# Altium PCB Copy of PCB2.PcbDoc
Units mil, origin at the board's own origin, x right, y up, seen from the top; angles counter-clockwise.
Board outline 2785 x 2500 mil, 2 copper layers (Top Layer, Bottom Layer); 53 components, 60 nets, 237 pads, 31 vias.
Unrouted connection lines stored in the file: 41.
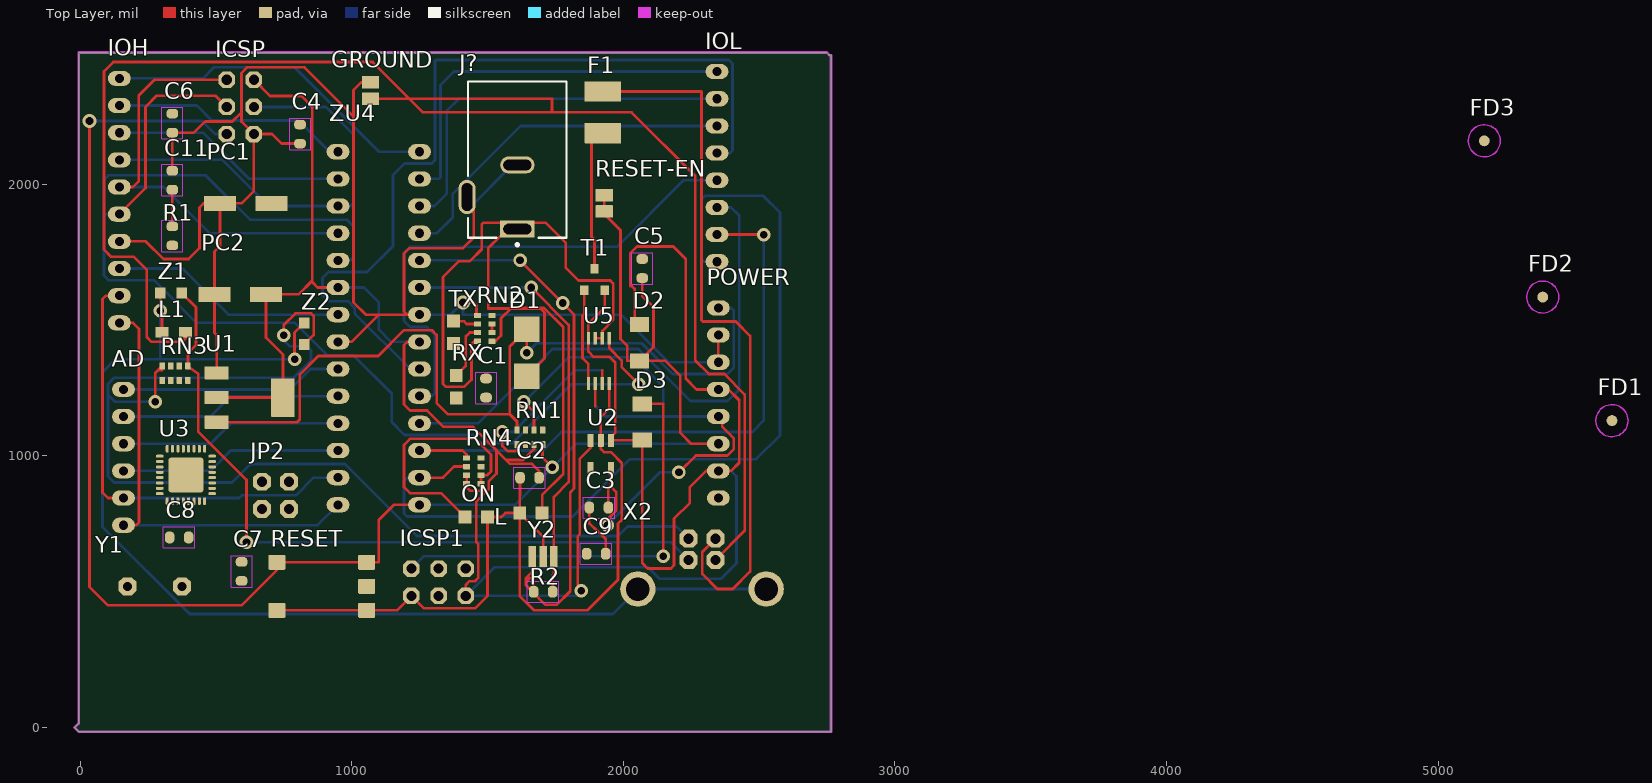
[diagram p0: Top Layer view]
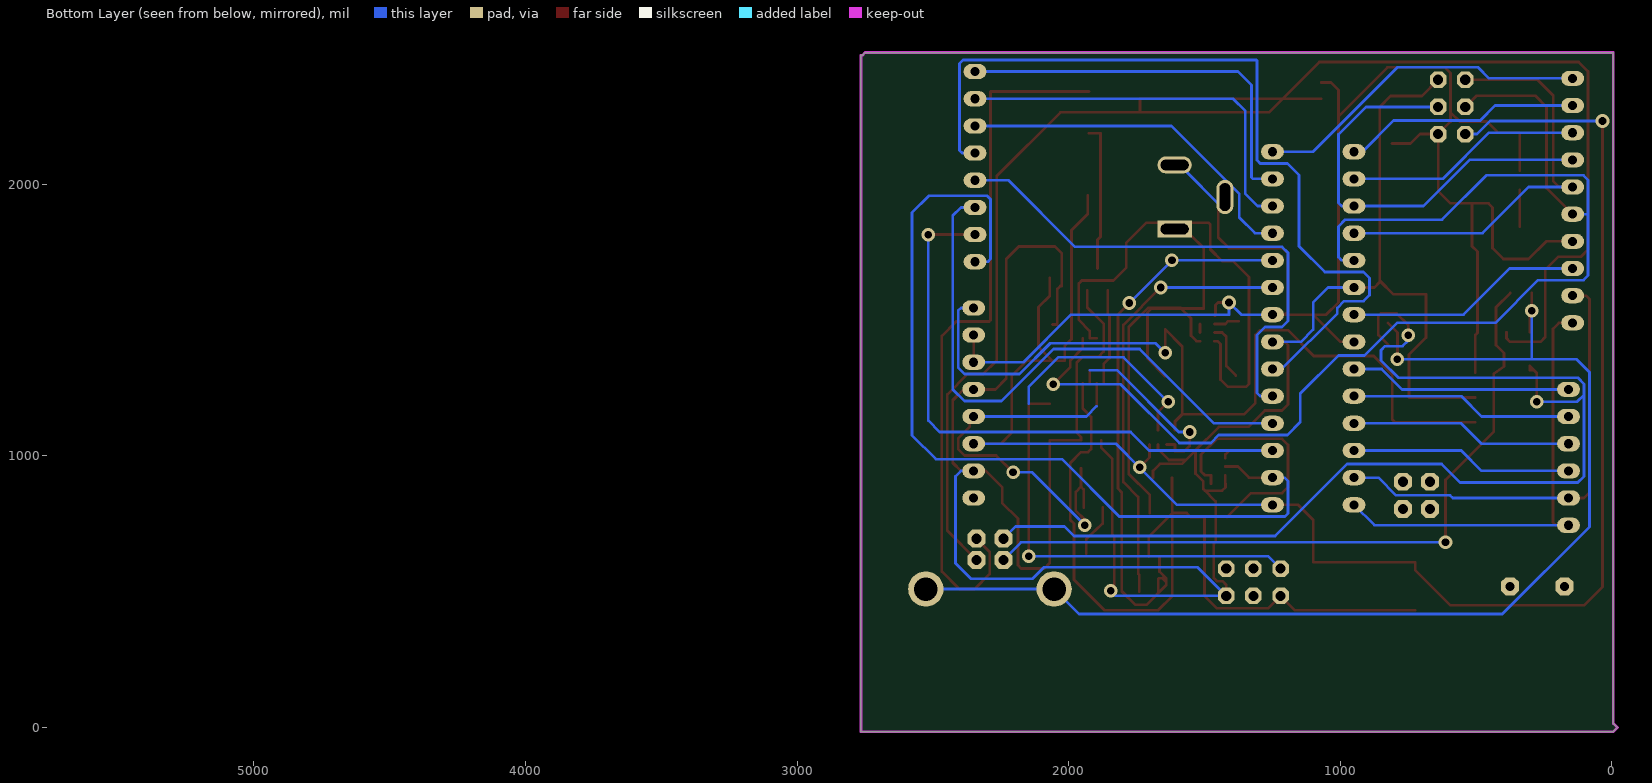
[diagram p1: Bottom Layer view, seen from below]

## Layer stack, top to bottom
Top Solder: solder mask 0.4, Solder Resist, Dk 3.5
Top Layer: signal copper 1.4
Dielectric 1: dielectric 12.6, FR-4, Dk 4.8
Bottom Layer: signal copper 1.4
Bottom Solder: solder mask 0.4, Solder Resist, Dk 3.5

## Board outline
2765,2475 2765,-15 -5,-15 -20,0 -5,15 -5,2485 2750,2485 2760,2475

## Design rules (kind name [scope] priority, off if disabled: settings)
Clearance [All] p1: gap=10 ignorepadtopadclearanceinfootprint=FALSE
PolygonConnect [All] p1: connectstyle=Relief reliefconductorwidth=10 reliefentries=4 polygonreliefangle="90 Angle" airgapwidth=10
RoutingVias [All] p1: holewidth=28 width=50 viastyle="Through Hole" minholewidth=28 minwidth=50 maxholewidth=28 maxwidth=50
SolderMaskExpansion [All] p1: expansion=0 istentingtop=FALSE
SupplyNets "Schematic Supply Nets_1" [InNet('+5V')] p1: voltage=0.000
SupplyNets "Schematic Supply Nets" [InNet('GND')] p2: voltage=0.000
Width [All] p1: maxlimit=10 minlimit=10 preferedwidth=10
30 further rules are at their usual default settings.

## Components (designator, comment, footprint, x,y, rotation, side; value= is the part's Value field where it differs from the comment)
AD "6x1F-H8.5" 1X06 160,995 r270 top
C1 "100n" C0603-ROUND 1495,1250 r90 top
C2 "100n" C0603-ROUND 1655,920 r0 top
C3 "1u" C0603-ROUND 1910,810 r0 top
C4 "100n" C0603-ROUND 810,2185 r90 top
C5 "100n" C0603-ROUND 2070,1690 r270 top
C6 "100n" C0603-ROUND 340,2225 r90 top
C7 "100n" C0603-ROUND 595,575 r270 top
C8 "1u" C0603-ROUND 365,700 r0 top
C9 "22p" C0603-ROUND 1900,640 r0 top
C11 "22p" C0603-ROUND 340,2015 r90 top
D1 "M7" SMB 1645,1380 r270 top
D2 "CD1206-S01575" MINIMELF 2060,1416.93 r270 top
D3 "CD1206-S01575" MINIMELF 2070,1125 r90 top
F1 "MF-MSMF050-2 500mA" L1812 1925,2265 r90 top
FD1 "FIDUCIALMOUNT" FIDUCIA-MOUNT 5640,1130 r0 top
FD2 "FIDUCIALMOUNT" FIDUCIA-MOUNT 5385,1585 r0 top
FD3 "FIDUCIALMOUNT" FIDUCIA-MOUNT 5170,2160 r0 top
GROUND "SJ" SJ 1070,2345 r270 top
ICSP "3x2 M" 2X03 590,2285 r270 top
ICSP1 "3x2 M" 2X03 1320,535 r180 top
IOH "10x1F-H8.5" 1X10 145,1940 r270 top
IOL "8x1F-H8.5" 1X08 2345,2065 r90 top
J? "PJ-102A" FP-PJ-102A-MFG 1610,2090.91 r0 top
JP2 "2x2 M - NM" 2X02 720,855 r270 top
L "YELLOW" CHIP-LED0805 1660,790 r90 top
L1 "BLM21" 0805 345,1455 r180 top
ON "GREEN" CHIP-LED0805 1458.66,775 r270 top
PC1 "47u" PANASONIC_D 610,1930 r0 top
PC2 "47u" PANASONIC_D 590,1595 r0 top
POWER "8x1F-H8.5" 1X08 2350,1195 r90 top
R1 "1M" R0603-ROUND 340,1810 r90 top
R2 "1M" R0603-ROUND 1705,500 r180 top
RESET "TS42031-160R-TR-7260" TS42 890,520 r180 top
RESET-EN "SJ" SJ 1930,1930 r90 top
RN1 "10K" CAY16 1655.75,1068.43 r0 top
RN2 "1K" CAY16 1490,1470 r90 top
RN3 "22R" CAY16 350,1305 r0 top
RN4 "1K" CAY16 1450,945 r270 top
RX "YELLOW" CHIP-LED0805 1385,1255 r180 top
T1 "FDN340P" SOT-23 1895,1650 r180 top
TX "YELLOW" CHIP-LED0805 1375,1455 r180 top
U1 "NCP1117ST50T3G" SOT223 625,1215 r270 top
U2 "LP2985-33DBVR" SOT23-DBV 1917.4,1006.18 r180 top
U3 "ATMEGA16U2-MU(R)" MLF32 390,930 r180 top
U5 "LMV358IDGKR" MSOP08 1910,1350 r0 top
U$1 "DISCLAIMER" DISCLAIMER 6815,-1510 r90 top
X2 "USB-B_TH" PN61729 2290,510 r0 top
Y1 "16MHz" QS 275,520 r180 top
Y2 "CSTCE16M0V53-R0 16MHZ" RESONATOR 1705,630 r0 top
Z1 "CG0603MLC-05E" CT/CN0603 335,1600 r180 top
Z2 "CG0603MLC-05E" CT/CN0603 825,1450 r90 top
ZU4 "ATMEGA328P-PU" DIL28-3 1100,1470 r90 top

## Footprints (in the part's own frame and the unit in brackets; to place one, negate y for a bottom-side part, rotate by r counter-clockwise, add the part's x,y. Pads: shape width x height; smd on the part's side, far side on the other; paste and mask are expansions set on the pad)
1X06 [mil] "1X06"
  oval 56x84 / inner round 0 / far side oval 56x84 hole 33.46: 1(-250,0) 2(-150,0) 3(-50,0) 4(50,0) 5(150,0) 6(250,0)
1X08 [mil] "1X08"
  oval 56x84 / inner round 0 / far side oval 56x84 hole 33.46: 1(-350,0) 2(-250,0) 3(-150,0) 4(-50,0) 5(50,0) 6(150,0) 7(250,0) 8(350,0)
1X10 [mil] "1X10"
  oval 56x84 / inner round 0 / far side oval 56x84 hole 33.46: 1(-450,0) 2(-350,0) 3(-250,0) 4(-150,0) 5(-50,0) 6(50,0) 7(150,0) 8(250,0) 9(350,0) 10(450,0)
2X02 [mil] "2X02"
  oct 66x66 / inner round 0 / far side oct 66x66 hole 37.4: 1(-50,-50) 2(-50,50) 3(50,-50) 4(50,50)
2X03 [mil] "2X03"
  oct 61.02x61.02 / inner round 0 / far side oct 61.02x61.02 hole 37.4: 1(-100,-50) 2(-100,50) 3(0,-50) 4(0,50) 5(100,-50) 6(100,50)
0805 [mm] "0805"
  rrect5% 1.2x1 smd: 1(-1.1,0) 2(1.1,0)
C0603-ROUND [mil] "C0603-ROUND"
  rrect80% 35.37x43.31 smd: 1(-35,0) 2(35,0)
  Top Layer keep-out lines w2: -57.99,38.7 -57.99,-38.7 57.99,-38.7 57.99,38.7 -57.99,38.7
CAY16 [mm] "CAY16"
  rrect10% 0.5x0.65 smd: 1(-1.2,-0.675) 2(-0.4,-0.675) 3(0.4,-0.675) 4(1.2,-0.675) 5(1.2,0.675) 6(0.4,0.675) 7(-0.4,0.675) 8(-1.2,0.675)
CHIP-LED0805 [mil] "CHIP-LED0805"
  rrect4% 47.24x47.24 smd: A(0,-41.34) C(0,41.34)
CT/CN0603 [mm] "CT/CN0603"
  rrect5% 1x1 smd: 1(-1,0) 2(1,0)
DIL28-3 [mil] "DIL28-3"
  oval 56x84 / inner round 0 / far side oval 56x84 hole 33.46: 1(-650,-150) 2(-550,-150) 3(-450,-150) 4(-350,-150) 5(-250,-150) 6(-150,-150) 7(-50,-150) 8(50,-150) 9(150,-150) 10(250,-150) 11(350,-150) 12(450,-150) 13(550,-150) 14(650,-150) 15(650,150) 16(550,150) 17(450,150) 18(350,150) 19(250,150) 20(150,150) 21(50,150) 22(-50,150) 23(-150,150) 24(-250,150) 25(-350,150) 26(-450,150) 27(-550,150) 28(-650,150)
DISCLAIMER [mil] "DISCLAIMER"
FIDUCIA-MOUNT [mil] "FIDUCIA-MOUNT"
  rrect100% 40x40 smd: P$1(0,0)
  Top Layer keep-out circle w5: c0,0 r59.06
FP-PJ-102A-MFG [mm]
  rect 3.2x1.6 hole 1 slot 2.6 at 0 deg paste-2539.97 mask+0: 1(0,-6.5)
  rrect100% 3.2x1.6 hole 1 slot 2.6 at 0 deg paste-2539.97 mask+0: 2(0,-0.5)
  rrect100% 1.6x3.2 hole 2.6 slot 1 at 0 deg paste-2539.97 mask+0: 3(-4.7,-3.5)
  silkscreen extent -4.6,-8.07 4.6,7.3, body extent -5.6,-7.4 4.7,7.4, height 0.25
L1812 [mil] "L1812"
  rrect2% 74.8x133.86 smd: 1(-76.77,0) 2(76.77,0)
MINIMELF [mil] "MINIMELF"
  rrect3% 55.12x70.87 smd: A(66.93,0) C(-66.93,0)
MLF32 [mil] "MLF32"
  rrect80% 27.56x11.02 smd: 1(-96.46,68.9) 2(-96.46,49.21) 3(-96.46,29.53) 4(-96.46,9.84) 5(-96.46,-9.84) 6(-96.46,-29.53) 7(-96.46,-49.21) 8(-96.46,-68.9) 17(96.46,-68.9) 18(96.46,-49.21) 19(96.46,-29.53) 20(96.46,-9.84) 21(96.46,9.84) 22(96.46,29.53) 23(96.46,49.21) 24(96.46,68.9)
  rrect80% 11.02x27.56 smd: 9(-68.9,-96.46) 10(-49.21,-96.46) 11(-29.53,-96.46) 12(-9.84,-96.46) 13(9.84,-96.46) 14(29.53,-96.46) 15(49.21,-96.46) 16(68.9,-96.46) 25(68.9,96.46) 26(49.21,96.46) 27(29.53,96.46) 28(9.84,96.46) 29(-9.84,96.46) 30(-29.53,96.46) 31(-49.21,96.46) 32(-68.9,96.46)
  rrect15% 128.11x128.11 smd paste+0 mask+0: 33(0,0)
MSOP08 [mil] "MSOP08"
  rrect16% 11.81x47.24 smd: 1(-38.43,-83.19) 2(-12.83,-83.19) 3(12.76,-83.19) 4(38.35,-83.19) 5(38.35,83.15) 6(12.76,83.15) 7(-12.83,83.15) 8(-38.43,83.15)
PANASONIC_D [mm] "PANASONIC_D"
  rrect3% 3x1.4 smd: +(2.4,0) -(-2.4,0)
PN61729 [mil] "PN61729"
  oct 66x66 / inner round 0 / far side oct 66x66 hole 37.4: 1(49.21,185.43) 2(-49.21,185.43) 3(-49.21,106.69) 4(49.21,106.69)
  round 129.91 / inner round 0 / far side round 129.91 hole 86.61: P$1(-236.22,0) P$2(236.22,0)
QS [mil] "QS"
  oct 66x66 / inner round 0 / far side oct 66x66 hole 33.46: 1(-100,0) 2(100,0)
R0603-ROUND [mil] "R0603-ROUND"
  rrect80% 35.37x43.31 smd: 1(-35,0) 2(35,0)
  Top Layer keep-out lines w2: -57.99,38.7 -57.99,-38.7 57.99,-38.7 57.99,38.7 -57.99,38.7
RESONATOR [mm] "RESONATOR"
  rrect7% 0.7x2 smd: 1(-1,0) 2(0,0) 3(1,0)
SJ [mil] "SJ"
  rrect4% 46x63 smd: 1(-30,0) 2(30,0)
SMB [mil] "SMB"
  rrect2% 94.49x94.49 smd: A(86.61,0) C(-86.61,0)
SOT23-DBV [mil] "SOT23-DBV"
  rrect9% 21.65x47.24 smd: 1(-37.4,-51.18) 2(0,-51.18) 3(37.4,-51.18) 4(37.4,51.18) 5(-37.4,51.18)
SOT223 [mil] "SOT223"
  rrect4% 48x88 smd: 1(-91,-122) 2(0,-122) 3(91,-122)
  rrect2% 141.73x86.61 smd: 4(0,122.01)
SOT-23 [mil] "SOT-23"
  rrect6% 31x35 smd: 1(1,-40) 2(-37,40) 3(39,40)
TS42 [mil] "TS42"
  rrect15% 62.99x55.12 smd: 1(-165.35,88.58) 2(165.35,88.58) 3(-165.35,-88.58) 4(165.35,-88.58)
  rrect15% 62.99x55.12 smd paste+0: 5(-165.35,0)

## Part data
AD: library part PINHD-1X6, "PIN HEADER", DeviceSetName=PINHD-1X6, GateName_1=A, LibraryName=SmartPrj, SymbolName_1=PINHD6
C1 C2 C3 C4 C5 C6 C7 C8 C9 C11: library part C-EU0603-RND, "CAPACITOR, European symbol", DeviceName=0603-RND, DeviceSetName=C-EU, GateName_1=G$1, LibraryName=SmartPrj, SymbolName_1=C-EU
D1: library part DIODE-SMB, "DIODE", DeviceName=SMB, DeviceSetName=DIODE-, GateName_1=G$1, LibraryName=diode, SymbolName_1=D
D2 D3: library part DIODE-MINIMELF, "DIODE", DeviceName=MINIMELF, DeviceSetName=DIODE-, GateName_1=G$1, LibraryName=diode, SymbolName_1=D
F1: library part L-EUL1812, "INDUCTOR, European symbol", DeviceName=L1812, DeviceSetName=L-EU, GateName_1=G$1, LibraryName=rcl, SymbolName_1=L-EU
GROUND RESET-EN: "SMD solder JUMPER", DeviceSetName=SJ, GateName_1=1, LibraryName=jumper, SymbolName_1=SJ
ICSP ICSP1: library part PINHD-2X3, "PIN HEADER", DeviceSetName=PINHD-2X3, GateName_1=A, LibraryName=SmartPrj, SymbolName_1=PINH2X3
IOH: library part PINHD-1X10_ARD, "PIN HEADER", DeviceSetName=PINHD-1X10_ARD, GateName_1=A, LibraryName=SmartPrj, SymbolName_1=PINHD10
IOL POWER: library part PINHD-1X8, "PIN HEADER", DeviceSetName=PINHD-1X8, GateName_1=A, LibraryName=SmartPrj, SymbolName_1=PINHD8
J?: library part CMP-12637-106234071-1, "PJ-102A 2.0 x 6.5 mm, 2.5 A, Horizontal, Through Hole, Tapered Pins, Dc Power Jack Connector", Color=Black, Current Rating=2.5A, Flammability Rating="UL94 V-0", Insulation Resistance=50MΩ, Max Operating Temperature=85°C, Min Operating Temperature=-25°C, Voltage Rating=24V, Contact Gender=Male, Contact Material="Copper, Nickel, Tin", Contact Plating=Nickel, Diameter=2.1mm, Gender=Male, Height=11.2mm, Housing Color=Black, Housing Material=Thermoplastic, Inside Diameter=2mm, Lead Free="Lead Free", Lifecycle Status=Production, Mount="Through Hole", NexarPartId=106234071, Number of Conductors=2, Number of Contacts=3, Orientation=Horizontal, Outside Diameter=6.5mm, Packaging=Bulk, RoHS=Compliant, Schedule B="8536695050, 8536695050", Shielding=No, Termination="Through Hole", Voltage Rating (DC)=24V
JP2: library part PINHD-2X2, "PIN HEADER", DeviceSetName=PINHD-2X2, GateName_1=A, LibraryName=SmartPrj, SymbolName_1=PINH2X2
L ON RX TX: library part LEDCHIP-LED0805, "LED   OSRAM: - CHIPLED LG R971, LG N971, LY N971, LG Q971, LY Q971, LO R971, LY R971 LH N974, LH R974 LS Q976, LO Q976, LY Q976 LO Q996 - Hyper CHIPLED LW Q18S LB Q993, LB Q99A, LB R99A - SideLED LS A670, LO A670, LY A670, LG A670, LP A670 LB A673, LV A673, LT A673, LW A673 LH A674 LY A675 LS A676, LA A676, LO A676, LY A676, LW A676 LS A679, LY A679, LG A679 -  Hyper Micro SIDELEDÂ® LS Y876, LA Y876, LO Y876, LY Y876 LT Y87S - SmartLED LW L88C, LW L88S LB L89C, LB L89S, LG L890 LS L89K, LO L89K, LY L89K LS L896, LA L896, LO L896, LY L896 - TOPLED LS T670, LO T670, LY T670, LG T670, LP T670 LSG T670, LSP T670, LSY T670, LOP T670, LYG T670 LG T671, LOG T671, LSG T671 LB T673, LV T673, LT T673, LW T673 LH T674 LS T676, LA T676, LO T676, LY T676, LB T676, LH T676, LSB T676, LW T676 LB T67C, LV T67C, LT T67C, LS T67K, LO T67K, LY T67K, LW E67C LS E67B, LA E67B, LO E67B, LY E67B, LB E67C, LV E67C, LT E67C LW T67C LS T679, LY T679, LG T679 LS T770, LO T770, LY T770, LG T770, LP T770 LB T773, LV T773, LT T773, LW T773 LH T774 LS E675, LA E675, LY E675, LS T675 LS T776, LA T776, LO T776, LY T776, LB T776 LHGB T686 LT T68C, LB T68C - Hyper Mini TOPLEDÂ® LB M676 - Mini TOPLED SantanaÂ® LG M470 LS M47K, LO M47K, LY M47K    Source: http://www.osram.convergy.de   LUXEON: - LUMILEDÂ® LXK2-PW12-R00, LXK2-PW12-S00, LXK2-PW14-U00, LXK2-PW14-V00 LXK2-PM12-R00, LXK2-PM12-S00, LXK2-PM14-U00 LXK2-PE12-Q00, LXK2-PE12-R00, LXK2-PE12-S00, LXK2-PE14-T00, LXK2-PE14-U00 LXK2-PB12-K00, LXK2-PB12-L00, LXK2-PB12-M00, LXK2-PB14-N00, LXK2-PB14-P00, LXK2-PB14-Q00 LXK2-PR12-L00, LXK2-PR12-M00, LXK2-PR14-Q00, LXK2-PR14-R00 LXK2-PD12-Q00, LXK2-PD12-R00, LXK2-PD12-S00 LXK2-PH12-R00, LXK2-PH12-S00 LXK2-PL12-P00, LXK2-PL12-Q00, LXK2-PL12-R00    Source: www.luxeon.com   KINGBRIGHT:   KA-3528ASYC Source: www.kingbright.com", DeviceName=CHIP-LED0805, DeviceSetName=LED, GateName_1=G$1, LibraryName=led, SymbolName_1=LED
L1: library part WE-CBF_0805, "SMD EMI Suppression Ferrite Beads - excellent anti-EMI properties - low DCR - impedances till 3000 ohms - rated current up to 6 A", DeviceName=_0805, DeviceSetName=WE-CBF, GateName_1=G$1, LibraryName=wuerth-elektronik, SymbolName_1=L
PC1 PC2: library part CPOL-EUD, "POLARIZED CAPACITOR, European symbol", +=+, DeviceName=D, DeviceSetName=CPOL-EU, GateName_1=G$1, LibraryName=rcl, SymbolName_1=CPOL
R1 R2: library part R-EU_R0603, "RESISTOR, European symbol", DeviceName=R0603, DeviceSetName=R-EU_, GateName_1=G$1, LibraryName=SmartPrj, SymbolName_1=R-EU
RESET: library part TS42, "TS42 Dongnan Electronics Tact switch VDC 12V - 50mA", DeviceSetName=TS42, GateName_1=G$1, LibraryName=SmartPrj, SymbolName_1=ST-MOD_V1.4_TS42
RN1 RN2 RN3 RN4: library part 4R-NCAY16, "Array Chip Resistor   Source: RS Component / Phycomp", DeviceName=CAY16, DeviceSetName=4R-N, GateName_1=A, GateName_2=B, GateName_3=C, GateName_4=D, LibraryName=resistor-dil, SymbolName_1=R1NV, SymbolName_2=R1NV, SymbolName_3=R1NV, SymbolName_4=R1NV
T1: library part PMOSSOT23, "MOS FET", DeviceSetName=PMOSSOT23, GateName_1=A, LibraryName=zetex, SymbolName_1=P_MOSFET
U1: library part MC33269ST*, "Adjustable Output Low Dropout Voltage Regulator 800 mA   Source: http://www.onsemi.com/pub/Collateral/MC33269-D.PDF", DeviceSetName=MC33269ST*, GateName_1=G$1, LibraryName=linear, SymbolName_1=VREG-O2
U2: library part LP2985-XXDBVR, "ULTRALOW-POWER 50-mA LOW-DROPOUT LINEAR REGULATORS   50-mA Low-Dropout Regulator Source: http://focus.ti.com/lit/ds/symlink/tps77001.pdf", DeviceSetName=LP2985-XXDBVR, GateName_1=G$1, LibraryName=SmartPrj, SymbolName_1=LP2985-XXDBVR
U3: library part ATMEGA16U2-MU, DeviceName=MU, DeviceSetName=ATMEGA16U2-, GateName_1=G$1, LibraryName=SmartPrj, SymbolName_1=ATMEL_MEGA8U2
U5: library part LMV358?*MM, "Dual General Purpose, Low Voltage, Rail-to-Rail Output Operational Amplifiers   Source: http://www.national.com/mpf/LM/LMV321.html http://www.national.com/dt/lmv_qual.pdf", DeviceName=MM, DeviceSetName=LMV358?*, GateName_1=A, GateName_2=B, GateName_3=P, LibraryName=linear, SymbolName_1=OPAMP, SymbolName_2=OPAMP, SymbolName_3=PWR+-, V+=V+, V-=V-
X2: library part PN61729, "BERG USB connector", DeviceSetName=PN61729, GateName_1=G$1, LibraryName=SmartPrj, SymbolName_1=J11, USB=USB
Y1: library part XTAL/S, "CRYSTAL", DeviceSetName=XTAL/S, GateName_1=G$1, LibraryName=SmartPrj, SymbolName_1=XTAL
Y2: library part RESONATORMU, DeviceName=MU, DeviceSetName=RESONATOR, GateName_1=G$1, LibraryName=SmartPrj, SymbolName_1=RESONATOR
Z1 Z2: library part VARISTORCN0603, "VARISTOR", DeviceName=CN0603, DeviceSetName=VARISTOR, GateName_1=G$1, LibraryName=varistor, SymbolName_1=VARISTOR
ZU4: "MICROCONTROLLER   4 Kbytes FLASH   128 bytes SRAM   256 bytes EEPROM   UART   6-channel 10 bit ADC", DeviceName=PU, DeviceSetName=ATMEGA328P-, GateName_1=G$1, LibraryName=SmartPrj, SymbolName_1=20-I/O-2
FD1 FD2 FD3: DeviceSetName=FIDUCIALMOUNT, GateName_1=G$1, LibraryName=SmartPrj, SymbolName_1=FIDUCIAL
U$1: ARDUINOisaregisteredtrademark.="ARDUINO is a registered trademark.", Arduinomaymakechangestospecificationsandproductdescriptionsatanytime,withoutnotice.TheCustomermustnot="Arduino may make changes to specifications and product descriptions at any time, without notice. The Customer must not", DeviceSetName=DISCLAIMER, GateName_1=G$1, LibraryName=SmartPrj, ReferenceDesignsAREPROVIDED"ASIS"AND"WITHALLFAULTS.ArduinoDISCLAIMSALLOTHERWARRANTIES,EXPRESSORIMPLIED,="Reference Designs ARE PROVIDED \"AS IS\" AND \"WITH ALL FAULTS. Arduino DISCLAIMS ALL OTHER WARRANTIES, EXPRESS OR IMPLIED,", REGARDINGPRODUCTS,INCLUDINGBUTNOTLIMITEDTO,ANYIMPLIEDWARRANTIESOFMERCHANTABILITYORFITNESSFORAPARTICULARPURPOSE="REGARDING PRODUCTS, INCLUDING BUT NOT LIMITED TO, ANY IMPLIED WARRANTIES OF MERCHANTABILITY OR FITNESS FOR A PARTICULAR PURPOSE", relyontheabsenceorcharacteristicsofanyfeaturesorinstructionsmarked"reserved"or"undefined."Arduinoreserves="rely on the absence or characteristics of any features or instructions marked \"reserved\" or \"undefined.\" Arduino reserves", SymbolName_1=DISCLAIMER, TheproductinformationontheWebSiteorMaterialsissubjecttochangewithoutnotice.Donotfinalizeadesignwiththisinformation.="The product information on the Web Site or Materials is subject to change without notice. Do not finalize a design with this information.", theseforfuturedefinitionandshallhavenoresponsibilitywhatsoeverforconflictsorincompatibilitiesarisingfromfuturechangestothem.="these for future definition and shall have no responsibility whatsoever for conflicts or incompatibilities arising from future changes to them."

## Via types
v1: diameter 50, hole 28, Top Layer to Bottom Layer, 31 vias

## Nets (pads, with @x,y where several pads share a name; then routed paths per layer and width w, separated by ;. In a path a pad name is that pad's centre, name@x,y a point inside that pad or via, vN(x,y) a via of type N, cw(c..) or ccw(c..) an arc to the next point about the centre after c; other vN are vias at no path point)
+3V3: C3.2 POWER.4 U2.5 U5.2 | length 2496.6
  Top Layer w10: 1897.17,1183.17 U5.2 ; C3.2 1945,877 1954.8,886.8 1954.8,887.2 ; U2.5 1954.8,887.2 ; v1@1941,765 1974,798 ; v1@1941,765 v1(1941,745) v1@1941,765 ; v1@1941,765 1974,798 ; 1954.8,887.2 1974,868 ; 1954.8,887.2 1974,868 ; 1974,798 1974,868 ; 1974,798 1974,868 ; 2267,1002 v1(2205,940) 2267,1002 ; 2267,1002 2384,1002 ; 2267,1002 2384,1002 ; 2364,1108 2407,1065 ; 2364,1108 POWER.4@2364,1145 ; 2364,1108 2407,1065 ; 2364,1108 POWER.4@2364,1145 ; POWER.4@2364,1145 POWER.4 POWER.4@2364,1145 ; 2384,1002 2407,1025 ; 2384,1002 2407,1025 ; 2407,1025 2407,1065 ; 2407,1025 2407,1065
  Bottom Layer w10: 1897.17,1183.17 1935.34,1145 POWER.4 ; 2136,940 v1(1941,745) 2136,940 ; 2136,940 v1(2205,940) 2136,940
  other v1: 1941,745 2205,940
+5V: C1.2 C2.2 C6.2 C7.1 D2.C D3.C ICSP1.2 ICSP.2 PC2.+ POWER.2 POWER.5 RN1.3 RN1.5 RN2.2 RN2.3 RN4.3 RN4.4 T1.2 U1.2 U1.4 U2.1 U2.3 U3.4 U3.32 U5.8 ZU4.7 ZU4.20 | length 13068.4
  Top Layer w10: U1.2 U1.4 747.01,1373 684.49,1435.52 PC2.+ 805,1595 855,1645 855,2285 ; ZU4.20 875,1620 855,1640 855,2285 ; ICSP1.2 1420,525 1434,539 1455,539 1466,550 1466,676 1459,683 1459,833 1504.37,878.37 ; RN4.3 RN4.4 1423,897.76 1423,884 1435,872 1498,872 1504.37,878.37 ; RN2.2 RN2.3 ; RN1.3 1671.5,1025 1631.5,985 1569,985 1447,1107 ; C2.2 1690,945 1664,971 1583,971 1447,1107 ; v1(1845,503) 1832,516 1832,704 1840,712 1840,990 1880,1030 U2.3 ; T1.2 1932,1547.43 1871.57,1487 U5.8 1871.57,1384 1890.57,1365 1950,1365 1970,1345 1970,1085.2 1954.8,1070 U2.1 2012,1057.36 2012.71,1058.07 D3.C 2070,606 2090,586 2175,586 2187,598 2187,769 2245,827 2245,885 2305,945 POWER.2 2397,945 2427,975 2427,1205 2387,1245 POWER.5 2270,1245 2230,1285 2230,1725 2184,1771 2051.3,1771 2025.3,1745 2025.3,1626 2031,1626 2042,1615 2042,1483.86 D2.C ; 700,2325 815,2325 ; 700,2325 ICSP.2 700,2325 ; 700,2325 815,2325 ; 815,2325 855,2285 ; 815,2325 855,2285 ; 1193,1189 1193,1408 ; 1193,1189 1215,1167 ; 1193,1189 1215,1167 ; 1193,1189 1193,1408 ; 1193,1189 1215,1167 ; 1193,1189 1193,1408 ; 1193,1189 1215,1167 ; 1193,1189 1193,1408 ; 1193,1408 1205,1420 ; 1193,1408 1205,1420 ; 1193,1408 1205,1420 ; 1193,1408 1205,1420 ; 1205,1420 ZU4.7 ; 1205,1420 ZU4.7 ; 1205,1420 ZU4.7 ; 1205,1420 ZU4.7 ; 1215,1167 1278,1167 ; 1215,1167 1278,1167 ; 1215,1167 1278,1167 ; 1215,1167 1278,1167 ; 1278,1167 1338,1107 ; 1278,1167 1338,1107 ; 1278,1167 1338,1107 ; 1278,1167 1338,1107 ; 1338,1107 1447,1107 ; 1338,1107 1447,1107 ; 1338,1107 1447,1107 ; 1338,1107 1447,1107 ; 1447,1107 1533,1021 ; 1447,1107 1533,1021 ; 1504.37,878.37 1504.37,906.08 ; 1504.37,878.37 1504.37,906.08 ; 1504.37,906.08 1533,934.71 ; 1504.37,906.08 1533,934.71 ; 1533,934.71 1533,1021 ; 1533,934.71 1533,1021
  Bottom Layer w10: ZU4.20 1045,1620 1100,1565 1100,1465 1145,1420 ZU4.7 ; v1(1845,503) 1827,485 ICSP1.2 1525,590 2092,590 2134,548 2360,548 2417,605 2417,925 2397,945 POWER.2
AD0: AD.1 ZU4.23 | length 821.1
  Bottom Layer w10: AD.1 773,1245 848,1320 ZU4.23
AD1: AD.2 ZU4.24 | length 821.1
  Bottom Layer w10: AD.2 480,1145 555,1220 ZU4.24
AD2: AD.3 ZU4.25 | length 821.1
  Bottom Layer w10: AD.3 480,1045 555,1120 ZU4.25
AD3: AD.4 ZU4.26 | length 821.1
  Bottom Layer w10: AD.4 480,945 555,1020 ZU4.26
AD4/SDA: AD.5 IOH.9 ZU4.27 | length 1686.3
  Top Layer w10: IOH.9 95,1590 83,1578 83,865 103,845 AD.5
  Bottom Layer w10: AD.5 586,845 596,855 795,855 860,920 ZU4.27
AD5/SCL: AD.6 IOH.10 ZU4.28 | length 1676.3
  Top Layer w10: IOH.10 195,1490 217,1468 217,755 207,745 AD.6
  Bottom Layer w10: AD.6 875,745 ZU4.28
AREF: C4.2 IOH.8 ZU4.21 | length 875.4
  Bottom Layer w10: IOH.8 377,1690 547,1520 ZU4.21
CMP: RN1.1 RN1.2 U5.3 | length 680.2
  Top Layer w10: v1(1555,1088) 1555,1037 1575,1017 1608.51,1017 RN1.1 RN1.2 ; U5.3 1922.76,1315.76
  Bottom Layer w10: v1(1555,1088) 1595,1088 1822.76,1315.76 1922.76,1315.76
D+: RN3.5 X2.3 Z1.1 | length 2700.5
  Top Layer w10: Z1.1 427,1547.37 427,1408 397.24,1378.24 RN3.5 397.24,1329 435,1303 435,1090 613,912 v1(613,682)
  Bottom Layer w10: v1(613,682) 2175.48,682 X2.3
D-: RN3.8 X2.2 Z2.1 | length 7129.9
  Top Layer w10: 277,1305 RN3.8 302.76,1316 288,1316 277,1305 ; 277,1305 v1(277,1200) 277,1305 ; v1(750,1445) 750,1482 ; v1(750,1445) 750,1482 ; v1(750,1445) 750,1482 ; 750,1482 793,1525 ; 750,1482 793,1525 ; 750,1482 793,1525 ; 793,1525 850,1525 ; 793,1525 850,1525 ; 793,1525 850,1525 ; Z2.1 860,1445.63 ; Z2.1 860,1445.63 ; Z2.1 860,1445.63 ; 850,1525 860,1515 ; 850,1525 860,1515 ; 850,1525 860,1515 ; 860,1445.63 860,1515 ; 860,1445.63 860,1515 ; 860,1445.63 860,1515
  Bottom Layer w10: X2.2 2196.22,740 2016,740 1981,705 1240,705 975,970 627,970 559,902 126,902 103,925 103,1265 ; 103,1225 128,1200 ; 103,1225 103,1265 ; 103,1225 128,1200 ; 103,1225 103,1265 ; 103,1265 126,1288 ; 103,1265 126,1288 ; 103,1265 126,1288 ; 126,1288 787,1288 ; 126,1288 787,1288 ; 126,1288 787,1288 ; 128,1200 v1(277,1200) 128,1200 ; v1@750,1425 771,1404 ; v1@750,1425 v1(750,1445) ; v1@750,1425 771,1404 ; v1@750,1425 v1(750,1445) ; v1@750,1425 771,1404 ; v1@750,1425 v1(750,1445) ; 771,1404 835,1404 ; 771,1404 835,1404 ; 771,1404 835,1404 ; 787,1288 850,1351 ; 787,1288 850,1351 ; 787,1288 850,1351 ; 835,1404 850,1389 ; 835,1404 850,1389 ; 835,1404 850,1389 ; 850,1351 850,1389 ; 850,1351 850,1389 ; 850,1351 850,1389
  other v1: 277,1200 750,1445 750,1445
DTR: C5.1 RN2.4 U3.13
GATE_CMD: T1.3 U5.1 | length 354.6
  Top Layer w10: T1.3 1856,1522 1850,1516 1850,1360 1871.57,1338.43 U5.1
GND: C1.1 C2.1 C3.1 C4.1 C6.1 C7.2 C9.2 C11.2 GROUND.1 ICSP1.6 ICSP.6 IOH.7 J?.2 J?.3 L.C ON.C PC1.- PC2.- POWER.6 POWER.7 RESET.1 RESET.2 RN1.7 RN2.5 U1.1 U2.2 U3.3 U3.33 U5.4 Y2.2 ZU4.8 ZU4.22 | length 14328.1
  Top Layer w10: IOH.7 242,1790 307,1725 400,1725 440,1765 440,1915 455,1930 PC1.- ; C11.2 C6.1 419,2190 460,2231 560.49,2231 594.49,2265 594.49,2410 ; U1.1 503,1446 495.51,1453.49 PC2.- 495.51,1752 515.51,1772 PC1.- ; RESET.2 RESET.1 1166.42,431.42 ICSP1.6 1266,439 1454,439 1500,485 ON.C 1551,775 1566,790 L.C ; C4.1 742,2150 707,2185 ICSP.6 ; ZU4.22 1000,1420 1100,1520 ZU4.8 ; GROUND.1 1035,2375 1007,2347 1007,1565 ; J?.3@1450,1930 1450,1805 1410,1765 1213,1765 1193,1745 1193,1532 1205,1520 ZU4.8 ; C2.1 1620,855.34 1618.66,854 L.C ; Y2.2 1705,703.66 L.C ; C3.1 1875,751 1935,695 C9.2 ; U5.4 1948.35,1174.95 1917.4,1144 U2.2 1917.4,1025 1928.4,1014 1955,1014 1994.5,974.5 1994.5,764.79 1981,751.3 1981,544.18 1868.82,432 1671.66,432 1618.66,485 L.C ; POWER.6 POWER.7 ; PC1.- 595,1930 640,1975 ICSP.6 ; 594.49,2410 594.49,2231 ICSP.6 ; 594.49,2410 615,2430.51 ; 594.49,2410 594.49,2230.51 ICSP.6 ; 594.49,2410 615,2430.51 ; 594.49,2410 615,2430.51 ; 615,2430.51 826.49,2430.51 ; 615,2430.51 826.49,2430.51 ; 615,2430.51 826.49,2430.51 ; 826.49,2430.51 1007,2250 ; 826.49,2430.51 1007,2250 ; 826.49,2430.51 1007,2250 ; 1007,1565 1052,1520 ; 1007,1565 1007,2250 ; 1007,1565 1052,1520 ; 1007,1565 1007,2250 ; 1007,1565 1052,1520 ; 1007,1565 1007,2250 ; 1007,1565 1052,1520 ; 1052,1520 ZU4.8 ; 1052,1520 ZU4.8 ; 1052,1520 ZU4.8 ; 1052,1520 ZU4.8 ; 1450,1565 v1(1410,1565) 1450,1565 ; 1450,1565 1460,1555 ; 1450,1565 1460,1555 ; RN2.5@1460,1517.24 1460,1555 ; RN2.5@1460,1517.24 RN2.5 RN2.5@1460,1517.24 ; RN2.5@1460,1517.24 1460,1555
  Bottom Layer w10: ZU4.8 1365,1520 v1(1410,1565) 1410,1520 1992,1520 2167,1345 POWER.6 ; J?.3@1450,1930 1568.11,2048.11 J?.2@1635.04,2048.11
  other v1: 1410,1565
IO0: IOL.1 RN4.2 ZU4.2 | length 3305.9
  Top Layer w10: ZU4.2 1336,920 1376.75,960.75 RN4.2
  Bottom Layer w10: ZU4.2 1205,920 1193,908 1193,788 1204,777 1814,777 2025,988 2489,988 2577,1076 2577,1896 2515,1958 2301,1958 2288,1945 2288,1725 2298,1715 IOL.1
IO1: IOL.2 RN4.1 ZU4.3 | length 2362
  Top Layer w10: ZU4.3 1408.43,1020 1423.43,1005 RN4.1 ; IOL.2 v1(2517,1815)
  Bottom Layer w10: ZU4.3 1704,1020 1772,1088 2475,1088 2517,1130 v1(2517,1815)
IO2: IOL.3 ZU4.4 | length 2122.3
  Bottom Layer w10: ZU4.4 1465,1120 1739,1394 2056,1394 2248,1202 2384,1202 2427,1245 2427,1885 2397,1915 IOL.3
IO3: IOL.4 ZU4.5 | length 1924.1
  Bottom Layer w10: ZU4.5 1295,1220 1307,1232 1307,1445 1277,1475 1215,1475 1193,1497 1193,1748 1215,1770 1977,1770 2222,2015 IOL.4
IO4: IOL.5 ZU4.6 | length 3141
  Bottom Layer w10: ZU4.6 1216,1320 1011,1525 1011,1545 986,1570 915,1570 893,1592 893,1655 915,1677 1057,1677 1152,1772 1152,2034 1195,2077 1295,2077 1307,2089 1307,2456 1309,2458 2389,2458 2402,2445 2402,2125 2392,2115 IOL.5
IO5: IOL.6 ZU4.11 | length 1310.2
  Bottom Layer w10: ZU4.11 1315,1820 1372,1877 1372,1965 1622,2215 IOL.6
IO6: IOL.7 ZU4.12 | length 1437.3
  Bottom Layer w10: ZU4.12 1305,1920 1350,1965 1350,2270 1395,2315 IOL.7
IO7: IOL.8 ZU4.13 | length 1457.2
  Bottom Layer w10: ZU4.13 1321,2020 1327,2026 1327,2365 1377,2415 IOL.8
IO8: IOH.1 ZU4.14 | length 1250.8
  Bottom Layer w10: IOH.1 452,2390 493,2431 789,2431 1100,2120 ZU4.14
IO9: IOH.2 ZU4.15 | length 875.4
  Bottom Layer w10: IOH.2 430,2290 485,2235 804,2235 919,2120 ZU4.15
L13: RN2.8 U5.6 U5.7 | length 1825
  Top Layer w10: RN2.8 1452,1422.76 1441,1411.76 1441,1281 1415,1255 1346,1255 1336,1265 1336,1658 1395,1717 1435,1717 1479,1761 1479,1852 1486,1859 1714,1859 1788,1785 1788,1693 1835,1646 1952,1646 1963,1635 1963,1501 1922.76,1460.76 U5.6 U5.7
M8RXD: RN4.7 U3.9
M8TXD: RN4.8 U3.8
MISO: ICSP.1 IOH.5 ZU4.18 | length 1618.6
  Top Layer w10: IOH.5 195,1990 216,2011 216,2326 275,2385 ICSP.1
  Bottom Layer w10: IOH.5 307,1990 477,1820 ZU4.18
MISO2: ICSP1.1 U3.17
MOSI: ICSP.4 IOH.4 ZU4.17 | length 1598.2
  Bottom Layer w10: IOH.4 524,2090 694,1920 ZU4.17 995,1920 1007,1932 1007,2184 906,2285 ICSP.4
MOSI2: ICSP1.4 U3.16
NetL_A: L.A RN2.1 | length 1096.1
  Top Layer w10: RN2.1 1529.76,1422.76 1550,1443 1550,1507 1588,1545 1708,1545 1779,1474 1779,933.94 1701.34,856.28 L.A
NetON_A: ON.A RN4.5 RN4.6 | length 914.6
  Top Layer w10: ON.A 1329.32,863 1215,863 1193,885 1193,1041 1215,1063 1455,1063 1513,1005 1513,943 1499.25,929.25 RN4.6 RN4.5
NetRN2_6: RN2.6 TX.A | length 92.8
  Top Layer w10: TX.A 1413,1496.34 1423.59,1485.75 RN2.6
NetRN2_7: RN2.7 RX.A | length 207.1
  Top Layer w10: RX.A 1419.66,1331 1419.66,1438.91 1435,1454.25 RN2.7
PB4: JP2.1 U3.18
PB5: JP2.3 U3.19
PB6: JP2.2 U3.20
PB7: JP2.4 U3.21
PWRIN: D1.A J?.1 | length 827.5
  Top Layer w10: J?.1 1549.89,1811.89 1503,1765 1503,1543 1695,1543 1710,1528 1710,1358.39 D1.A
RD+: RN3.4 U3.29
RD-: RN3.1 U3.30
RESET: C5.2 D2.A ICSP.5 POWER.3 RESET-EN.1 RESET-EN.2 RESET.3 RESET.4 RN1.4 ZU4.1 | length 6708.3
  Top Layer w10: v1(35,2233) 35,518 103,450 595,450 724.65,579.65 RESET.4 RESET.3 1100,608.58 1100,765 1155,820 ZU4.1 ; RESET-EN.2 RESET-EN.1 1930,1891 1990,1831 1990,1430 2015,1405 2015,1350 D2.A ; C5.2 2070,1589 2111,1548 2111,1401 D2.A ; POWER.3 2250,1045 2210,1085 2210,1295 2155,1350 D2.A ; 1702.99,994.01 v1(1739,958) 1702.99,994.01 ; 1702.99,994.01 RN1.4 1702.99,994.01
  Bottom Layer w10: v1(35,2233) 449,2233 497,2185 ICSP.5 ; ZU4.1 1601,820 v1(1739,958) 1826,1045 POWER.3
  other v1: 1739,958
RESET2: D3.A ICSP1.5 RN1.6 U3.24 | length 3200.5
  Top Layer w10: D3.A 2147,1191.93 v1(2147,631) ; 1671.5,1161.5 v1(1634,1199) 1671.5,1161.5 ; 1671.5,1161.5 RN1.6 1671.5,1161.5
  Bottom Layer w10: ICSP1.5 1266,631 v1(2147,631) ; 1798,1363 2039,1363 ; 1798,1363 v1(1634,1199) 1798,1363 ; 1798,1363 2039,1363 ; 2039,1363 2147,1255 ; 2039,1363 2147,1255 ; 2147,1255 2147,1191.93 2147,1255
  other v1: 1634,1199
RXLED: RX.C U3.10
SCK: ICSP.3 IOH.6 U5.5 ZU4.19 | length 7762.2
  Top Layer w10: IOH.6 241,1986 241,2285 282,2326 499,2326 ICSP.3 ; 1948.35,1396.65 1994,1351 ; 1948.35,1396.65 U5.5 1948.35,1396.65 ; 1948.35,1396.65 1994,1351 ; 1994,1327 v1(2057.5,1263.5) 1994,1327 ; 1994,1327 1994,1351 ; 1994,1327 1994,1351
  Bottom Layer w10: IOH.6 88,1890 88,1664 ; ZU4.19 995,1720 1007,1732 1007,1845 982,1870 626,1870 463,2033 105,2033 88,2016 88,1664 ; 88,1664 105,1647 ; 88,1664 105,1647 ; 105,1647 272,1647 ; 105,1647 272,1647 ; 272,1647 429,1490 ; 272,1647 429,1490 ; 429,1490 791,1490 ; 429,1490 791,1490 ; 791,1490 911,1370 ; 791,1490 911,1370 ; 911,1370 1007,1370 ; 911,1370 1007,1370 ; 1007,1370 1148,1229 ; 1007,1370 1148,1229 ; 1148,1124 1148,1229 ; 1148,1124 1195,1077 ; 1148,1124 1148,1229 ; 1148,1124 1195,1077 ; 1195,1077 1448,1077 ; 1195,1077 1448,1077 ; 1448,1077 1477,1048 ; 1448,1077 1477,1048 ; 1477,1048 1593,1048 ; 1477,1048 1593,1048 ; 1593,1048 1808.5,1263.5 ; 1593,1048 1808.5,1263.5 ; 1808.5,1263.5 v1(2057.5,1263.5) 1808.5,1263.5
  other v1: 2057.5,1263.5
SCK2: ICSP1.3 U3.15
SS: IOH.3 ZU4.16 | length 875.4
  Bottom Layer w10: IOH.3 453,2190 623,2020 ZU4.16
TP_VUCAP: C8.1 U3.27
TXLED: TX.C U3.11
UGND: C8.2 GROUND.2 L1.1 U3.28 X2.4 | length 8112.1
  Top Layer w10: L1.1 388.31,1433.31 375,1420 263,1420 246,1437 246,1685 198,1733 115,1733 88,1760 88,2416 122.51,2450.51 1077.49,2450.51 1263,2265 2031,2265 ; GROUND.2 1107,2315 1738,2315 1738,2265 2031,2265 ; 2031,2265 2265,2031 ; 2031,2265 2265,2031 ; 2265,1352 2265,2031 ; 2265,1352 2315,1302 ; 2265,1352 2265,2031 ; 2265,1352 2315,1302 ; 2315,1302 2372,1302 ; 2315,1302 2372,1302 ; 2372,1302 2447,1227 ; 2372,1302 2447,1227 ; 2447,724.48 2447,1227 ; 2447,724.48 X2.4 2447,724.48 ; 2447,724.48 2447,1227
USBVCC: F1.1 T1.1 U3.31 | length 544.8
  Top Layer w10: T1.1 1894,1796 1883,1807 1883,2188.23 F1.1
USHIELD: L1.2 X2.P$1 X2.P$2 Z1.2 Z2.2 | length 5846.4
  Top Layer w10: v1(295.63,1534.63) Z1.2 ; L1.2 v1@301.69,1524 ; v1(790,1356) 790,1454.37 ; v1(790,1356) 790,1454.37 ; v1(790,1356) 790,1454.37 ; 790,1454.37 Z2.2 ; 790,1454.37 Z2.2 ; 790,1454.37 Z2.2
  Bottom Layer w10: v1@301.69,1524 v1(295.63,1534.63) ; X2.P$2 X2.P$1 1961.78,418 404,418 83,739 83,1308 131,1356 v1(790,1356) ; 295.63,1356 v1(295.63,1534.63) ; 295.63,1356 v1(790,1356) ; 295.63,1356 v1(295.63,1534.63) ; 295.63,1356 v1(790,1356)
  other v1: 790,1356 790,1356
VIN: D1.C PC1.+ POWER.8 RN1.8 U1.3 | length 3258.6
  Top Layer w10: U1.3 798.44,1124 809.44,1135 809.44,1300.44 877,1368 1098,1368 1193,1463 1295,1463 1313,1445 1313,1195 1355,1153 1580.51,1153 1608.51,1125 RN1.8 1608.51,1128 1582,1154.51 1582,1403.61 D1.C v1(1645,1380)
  Bottom Layer w10: v1(1645,1380) 1680,1415 2068,1415 2181,1302 2384,1302 2407,1325 2407,1535 2397,1545 POWER.8
XT1: C9.1 R1.1 U3.1 Y1.2
XT2: C11.1 R1.2 U3.2 Y1.1 | length 135
  Top Layer w10: R1.2 C11.1
XTAL1: R2.1 Y2.3 ZU4.9 | length 1613
  Top Layer w10: v1(1661.63,1620) 1799,1482.63 1799,904 1744.37,849.37 Y2.3 1744.37,566.37 1740,562 R2.1
  Bottom Layer w10: ZU4.9 v1(1661.63,1620)
XTAL2: R2.2 Y2.1 ZU4.10 | length 3990.7
  Top Layer w10: v1(1620,1720) 1819,1521 ; Y2.1 1665.63,574 1641,549.37 1641,525 ; R2.2 1670,547 1667.63,549.37 1655,549.37 1641,535.37 1641,525 ; v1(1777,1563) 1819,1521 ; 1641,525 1714,452 ; 1641,525 1714,452 ; 1714,452 1755,452 ; 1714,452 1755,452 ; 1755,452 1804.89,501.89 ; 1755,452 1804.89,501.89 ; 1804.89,501.89 1804.89,865.72 ; 1804.89,501.89 1804.89,865.72 ; 1804.89,865.72 1819,879.83 ; 1804.89,865.72 1819,879.83 ; 1819,879.83 1819,1521 ; 1819,879.83 1819,1521
  Bottom Layer w10: v1(1777,1563) v1(1620,1720) ; v1(1620,1720) ZU4.10 v1(1620,1720)
XUSB: F1.2 X2.1 | length 2650.9
  Top Layer w10: F1.2 2287,2341.77 2288,2340.77 2288,1500 2293,1495 2414,1495 2467,1442 2467,574 2403,510 2346,510 2291,565 2291,647.22 X2.1
pads on no net: FD1.P$1 FD2.P$1 FD3.P$1 POWER.1 RESET.5 RN3.2 RN3.3 RN3.6 RN3.7 U2.4 U3.5 U3.6 U3.7 U3.12 U3.14 U3.22 U3.23 U3.25 U3.26

## Keep-outs
Keep-Out Layer:
  the board outline again, w10

## Text inside footprints (layer, text, board x,y; h text height)
U1: Mechanical 7 "2" at 454.63,1265.81 h27.2 r270; Mechanical 7 "1" at 455,1350.93 h27.2 r270; Mechanical 7 "4" at 725,1140 h27.2 r270; Mechanical 7 "3" at 455,1174.81 h27.2 r270
U3: Mechanical 7 "1" at 512.05,851.26 h27.2 r180
U$1: Top Layer "ARDUINO is a registered trademark." at 6700,-1510 h56.1 r90; Top Layer "The product information on the Web Site or Materials is subject to change without notice. Do not finalize a design with this information." at 6580,-1510 h42.5 r90; Top Layer "these for future definition and shall have no responsibility whatsoever for conflicts or incompatibilities arising from future changes to them." at 6460,-1510 h42.5 r90; Top Layer "rely on the absence or characteristics of any features or instructions marked \"reserved\" or \"undefined.\" Arduino reserves" at 6380,-1510 h42.5 r90; Top Layer "Arduino may make changes to specifications and product descriptions at any time, without notice. The Customer must not" at 6300,-1510 h42.5 r90; Top Layer "REGARDING PRODUCTS, INCLUDING BUT NOT LIMITED TO, ANY IMPLIED WARRANTIES OF MERCHANTABILITY OR FITNESS FOR A PARTICULAR PURPOSE" at 6180,-1510 h42.5 r90; Top Layer "Reference Designs ARE PROVIDED \"AS IS\" AND \"WITH ALL FAULTS. Arduino DISCLAIMS ALL OTHER WARRANTIES, EXPRESS OR IMPLIED," at 6100,-1510 h42.5 r90